# EAGLE board mac-serial-interposer-26ls32 (EAGLE 6.5.0)
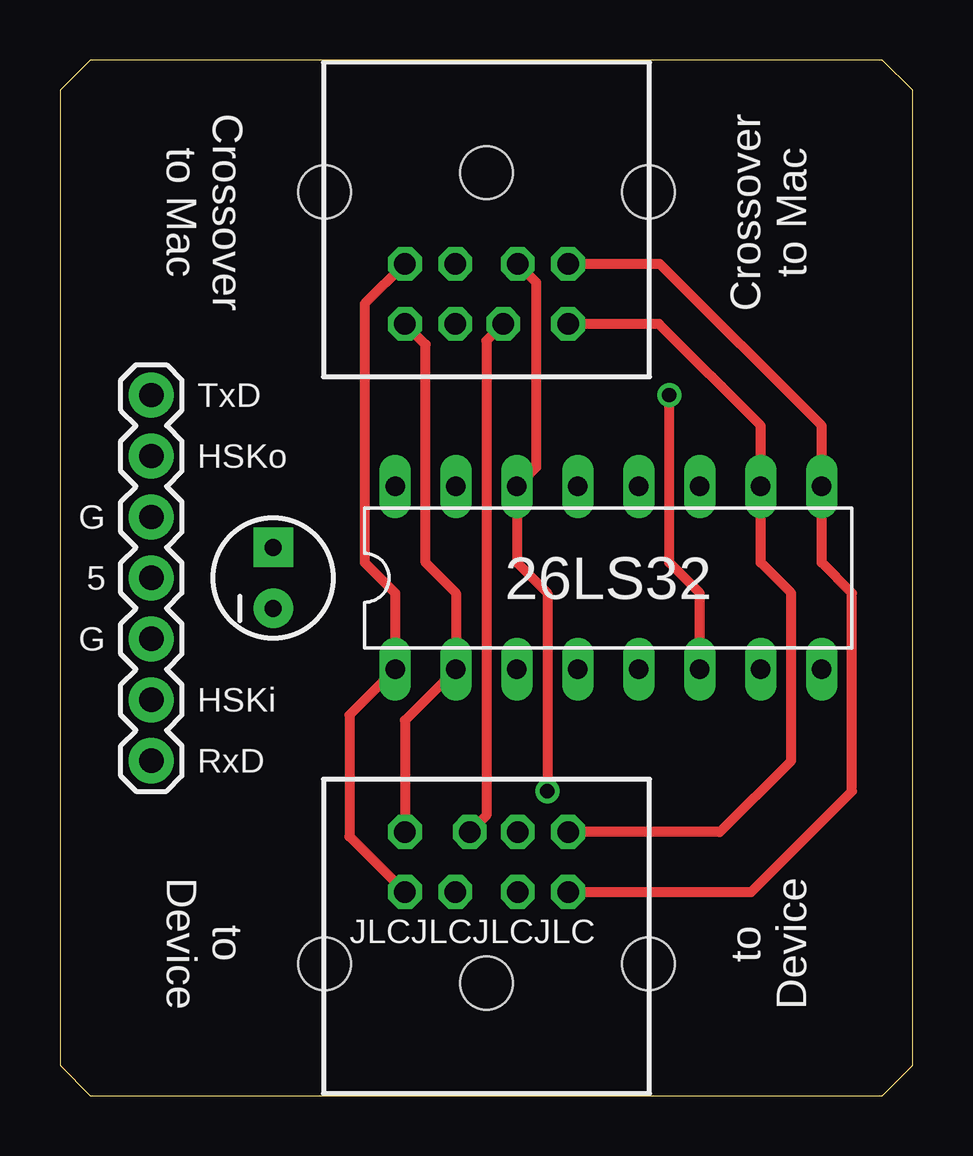
[diagram p0: board, top side]
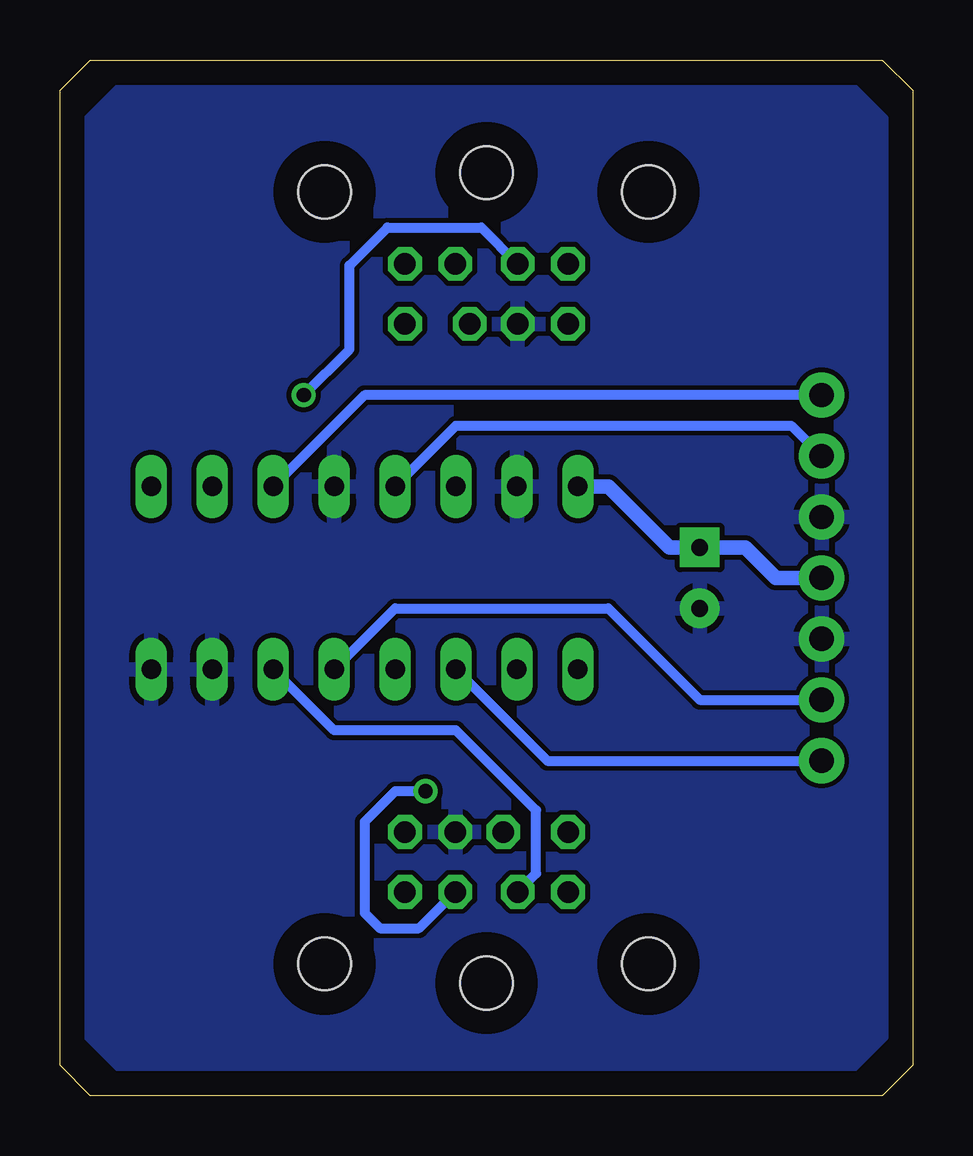
[diagram p1: board, bottom side, seen from below]

Size 35.56 x 43.18 mm. Coordinates in mm from the lower left corner, seen from the top.
Outline: 1.27,0 34.29,0 35.56,1.27 35.56,41.91 34.29,43.18 1.27,43.18 0,41.91 0,1.27 1.27,0
Copper layers (1*16): Top 0.035mm / dielectric 1.5mm / Bottom 0.035mm
Design rules "default": minimum track width 10mil, minimum drill 24mil, track to track 8mil, track to pad 8mil, pad to pad 8mil, via to via 8mil, smd to smd 8mil, copper to edge 40mil, drill to drill 8mil, minimum pad ring 10mil, minimum via ring 8mil, stop-mask expansion 4mil, vias tented up to drill 0mil, thermal gap 10mil

## Footprints (pad centres in the part's own frame; a part is rotated, then mirrored left to right if it is on the bottom)
SSV-BC08 = drill 0.9 octagon: 1 1.3,8.5; 2 -1.3,8.5; 3 3.4,8.5; 4 1.3,11; 5 -3.4,8.5; 6 3.4,11; 7 -0.7,11; 8 -3.4,11 | hole 2.2: -6.75,5.5; 0,4.7; 6.75,5.5
1X07 = drill 1.016 pad 1.88: 1 0,0; 2 2.54,0; 3 5.08,0; 4 7.62,0; 5 10.16,0; 6 12.7,0; 7 15.24,0
DIL16 = drill 0.813 long: 1 -8.89,-3.81; 2 -6.35,-3.81; 3 -3.81,-3.81; 4 -1.27,-3.81; 5 1.27,-3.81; 6 3.81,-3.81; 7 6.35,-3.81; 8 8.89,-3.81; 9 8.89,3.81; 10 6.35,3.81; 11 3.81,3.81; 12 1.27,3.81; 13 -1.27,3.81; 14 -3.81,3.81; 15 -6.35,3.81; 16 -8.89,3.81
CPOL-RADIAL-10UF-25V = drill 0.7 pad 1.651 square: 1 1.27,0 | drill 0.7 pad 1.651: 2 -1.27,0

## Placement (x,y rotation side)
E$1  [SSV-BC08]  17.78,43.18 180 top
E$2  [SSV-BC08]  17.78,0 0 top
E$3  [1X07]  3.81,13.97 90 top
E$4  [DIL16]  22.86,21.59 0 top
E$6  [CPOL-RADIAL-10UF-25V]  8.89,21.59 90 top

## Library data of the parts
E$1 E$2 = con-yamaichi
E$3 = SparkFun-Connectors
E$4 = ic-package
E$6 = SparkFun-Capacitors

## Nets
GND: E$1.4 E$2.4 E$3.3 E$3.5 E$4.7 E$4.8 E$4.12 E$4.15 E$6.2
S$1: E$3.4 E$4.16 E$6.1
S$2: E$1.8 E$2.6 E$4.10
S$3: E$1.3 E$2.5 E$4.1
S$4: E$1.6 E$2.8 E$4.2
S$5: E$1.5 E$2.3 E$4.9
S$6: E$1.7 E$2.7
S$7: E$1.2 E$2.1 E$4.14
S$8: E$3.6 E$4.13
S$9: E$3.7 E$4.11
S$10: E$1.1 E$2.2 E$4.6
S$11: E$3.1 E$4.3
S$12: E$3.2 E$4.5

## Tracks (layer width: path | path; a pad name or v marks a point on that pad's centre or on a via)
GND
  pour Bottom: 1.27,40.64 2.54,41.91 33.02,41.91 34.29,40.64 34.29,2.54 33.02,1.27 2.54,1.27 1.27,2.54
S$1
  Bottom 0.61: E$3.4 5.71,21.59 6.99,22.86 E$6.1 10.16,22.86 12.7,25.4 E$4.16
S$2
  Top 0.406: E$2.6 27.51,11 30.48,13.97 30.48,20.95 29.21,22.23 E$4.10 29.21,27.94 24.97,32.18 E$1.8
S$3
  Top 0.406: E$1.3 14.36,34.68 12.7,33.02 12.7,22.23 13.97,20.95 E$4.1 12.06,15.88 12.06,10.81 E$2.5
S$4
  Top 0.406: E$2.8 14.38,15.65 E$4.2 16.51,20.95 15.24,22.23 15.24,31.32 E$1.6
S$5
  Top 0.406: E$2.3 28.82,8.5 33.02,12.7 33.02,20.95 31.75,22.23 E$4.9 31.75,27.94 25.01,34.68 E$1.5
S$6
  Top 0.406: E$1.7 17.78,31.48 17.78,11.7 E$2.7
S$7  (via drill 0.6)
  Top 0.406: E$1.2 19.84,33.92 19.84,26.19 E$4.14 19.05,22.23 20.32,20.95 v20.32,12.7
  Bottom 0.406: E$2.1 20.59,6.99 22.23,6.99 22.86,7.62 22.86,11.43 21.59,12.7 v20.32,12.7
S$8
  Bottom 0.406: E$4.13 19.05,27.94 5.08,27.94 E$3.6
S$9
  Bottom 0.406: E$3.7 22.86,29.21 E$4.11
S$10  (via drill 0.6)
  Top 0.406: E$4.6 26.67,20.95 25.4,22.23 v25.4,29.21
  Bottom 0.406: E$2.2 15.72,9.26 15.72,11.91 19.05,15.24 24.13,15.24 E$4.6 | v25.4,29.21 23.5,31.11 23.5,34.61 21.91,36.2 18,36.2 E$1.1
S$11
  Bottom 0.406: E$4.3 15.24,13.97 E$3.1
S$12
  Bottom 0.406: E$4.5 21.59,20.32 12.7,20.32 8.89,16.51 E$3.2

## Text on the board
tNames: Crossover / to Mac | Crossover / to Mac | TxD | HSKo | G | 5 | 26LS32 | G | HSKi | RxD | to / Device | JLCJLCJLCJLC | to / Device